# Altium PCB micromouse.PcbDoc (part 2 of 2)
Units mil, origin at the board's own origin, x right, y up, seen from the top; angles counter-clockwise.
Board outline 2757.75 x 3935.86 mil, 2 copper layers (Top, Bottom); 175 components, 116 nets, 552 pads, 234 vias.
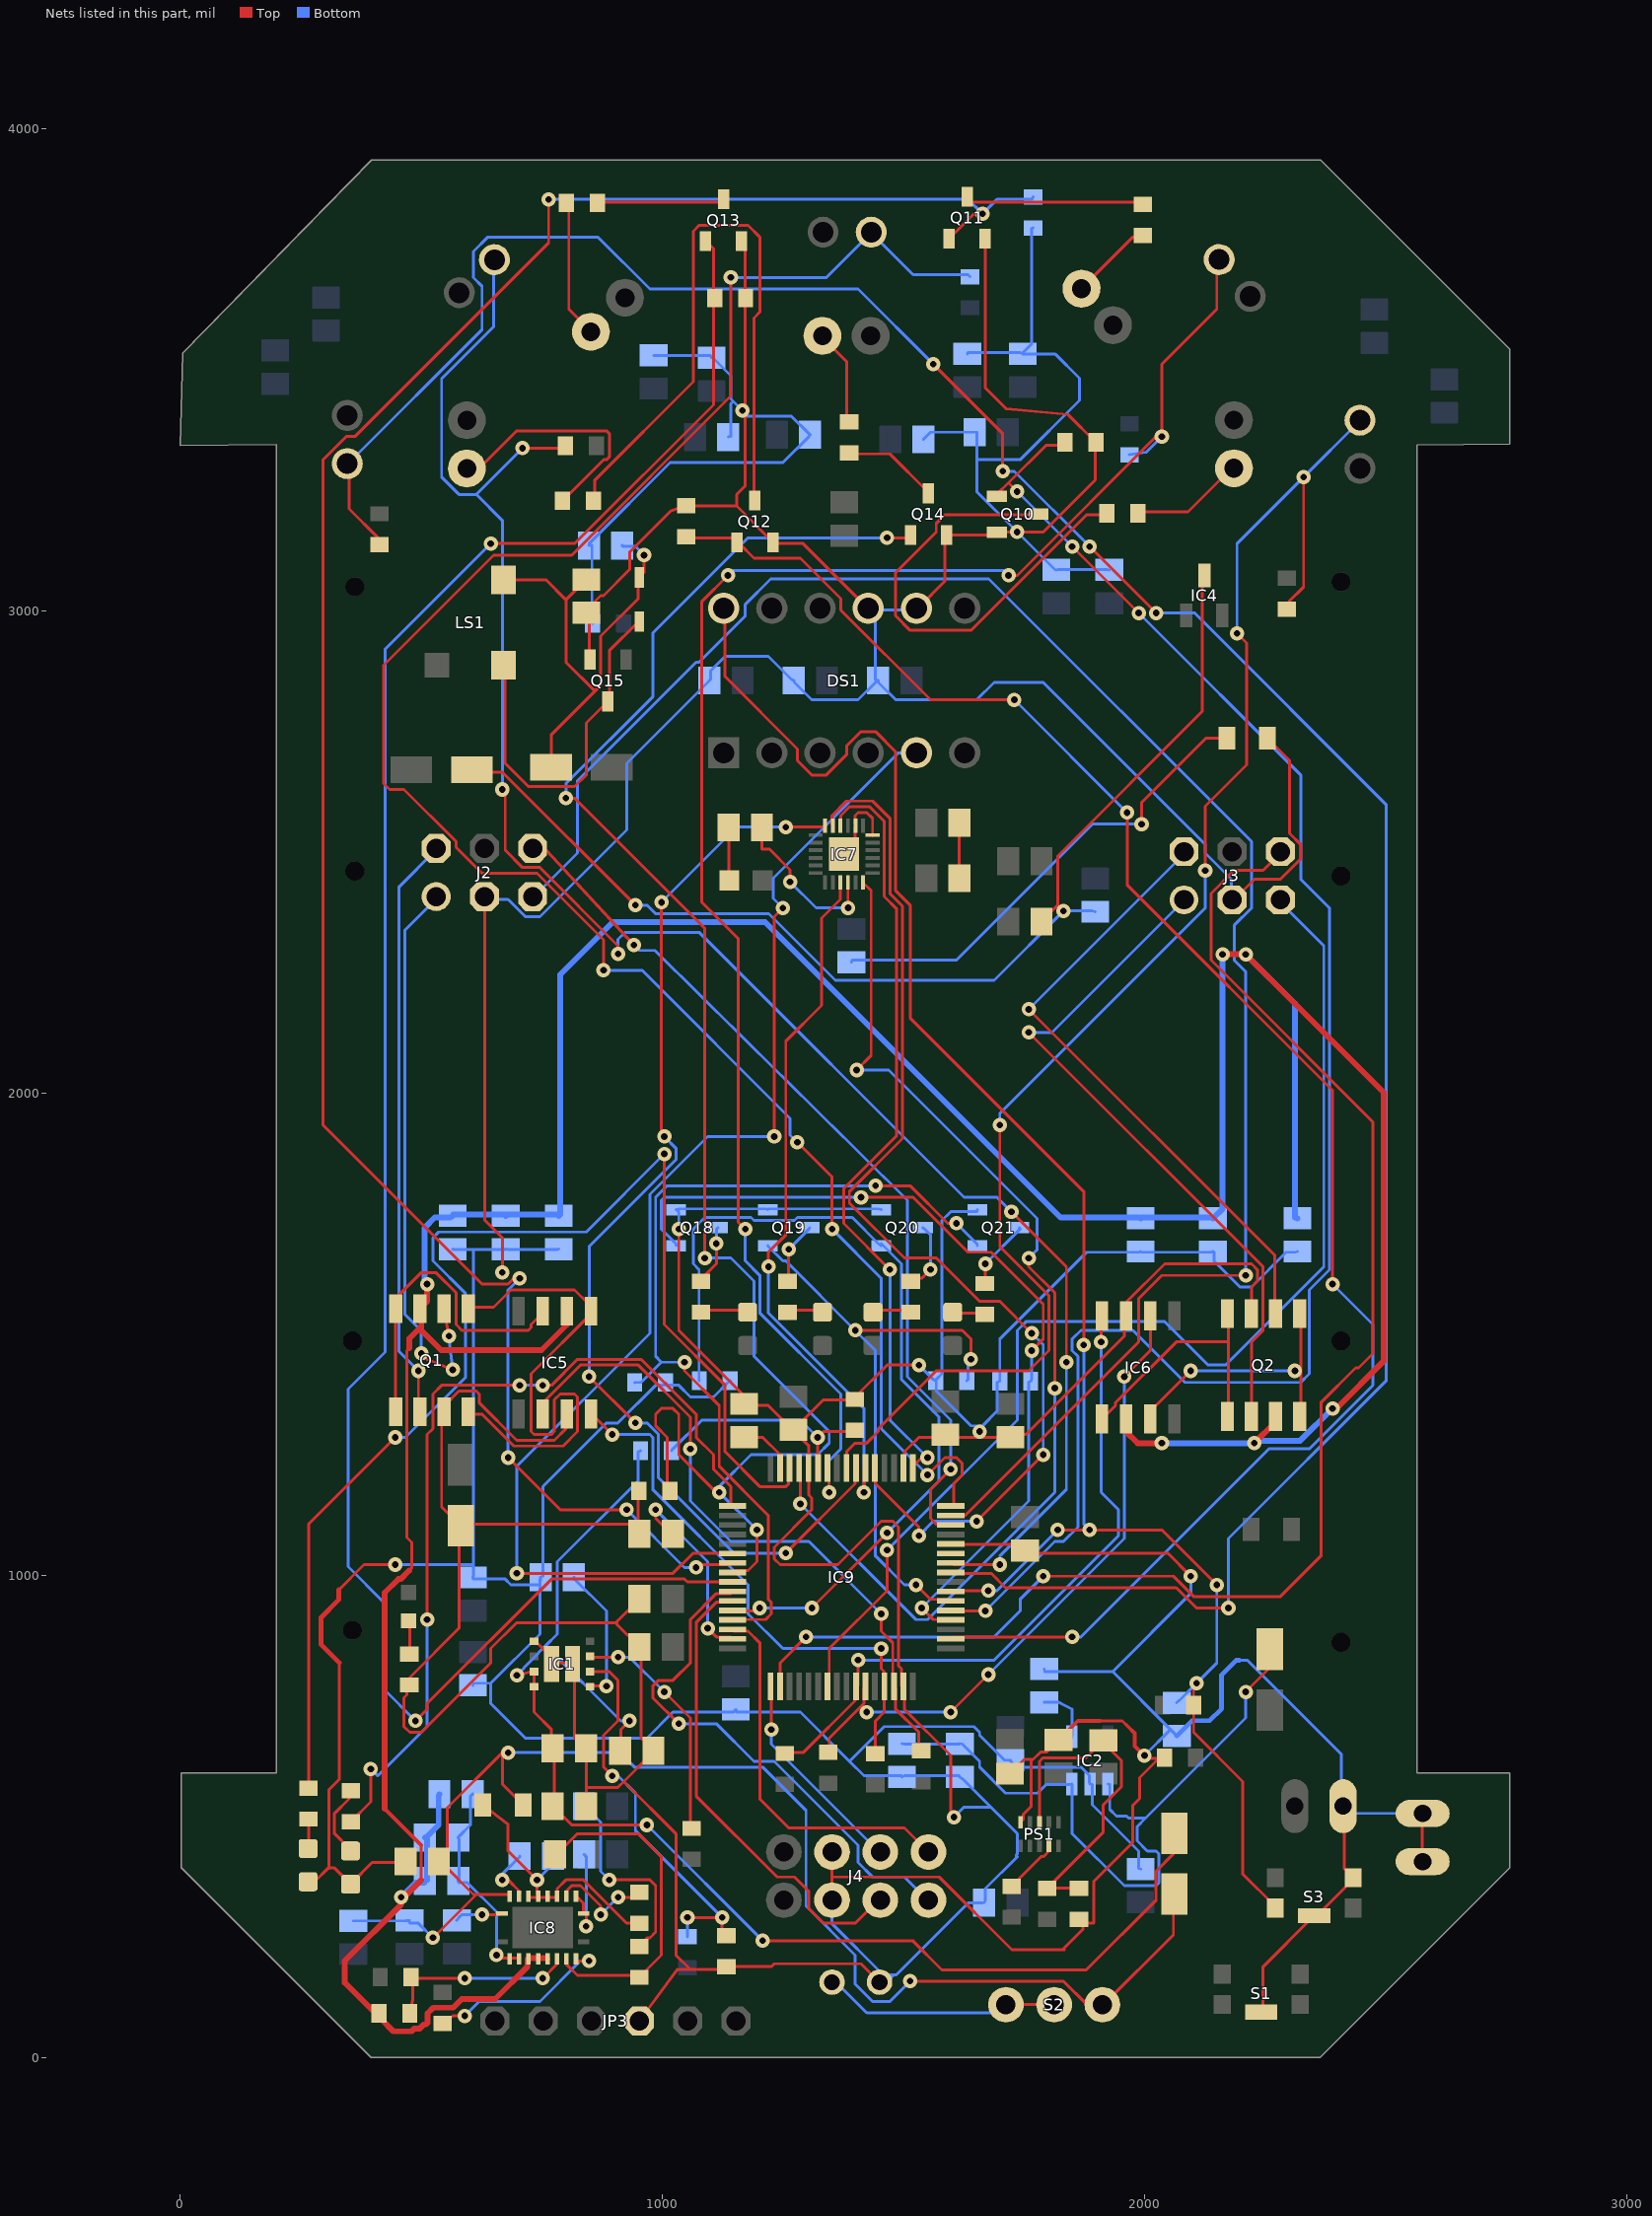
[diagram p2: the nets of this part, all layers, seen from the top]

## Via types
v1: diameter 29.78/29.78 (per signal layer), hole 13.78, Top to Bottom, 234 vias

## Nets (pads, with @x,y where several pads share a name; then routed paths per layer and width w, separated by ;. In a path a pad name is that pad's centre, name@x,y a point inside that pad or via, vN(x,y) a via of type N, cw(c..) or ccw(c..) an arc to the next point about the centre after c; other vN are vias at no path point) (continued)
GND: C2V_1.1 C2V_3.1 C3.3V_7.1 C5V4_5.2 C_3.3V_5.1 C_3.3V_6.1 C_5V4_4.1 C_A3.3V_1.1 C_A3.3V_3.1 C_BAT.2 C_DSP1.2 C_DSP2.2 C_DSP3.2 C_EM1.2 C_EM2.2 C_EM3.2 C_EM4.2 C_EM5.2 C_EM6.2 C_EM7.2 C_EM8.2 C_EM9.2 C_EM10.2 C_EM11.2 C_EM12.1 C_M1.2 C_M2.1 C_M4.1 C_M5.2 C_MB_L.1 C_MB_R.1 C_RST.2 C_SS1.1 C_V1.1 C_V2.2 C_V3.2 C_V4.2 C_VA1.2 C_VA2.2 C_VBAT1.2 C_VBAT2.2 C_VBAT3.1 C_VBAT4.1 C_VCAP1.1 C_VCAP2.2 CNR.1 D22.C D23.C DS1.8 DS1.9 IC1.5 IC1.9 IC1.10 IC2.2 IC5.3 IC6.3 IC9.12 IC9.18 IC9.28 IC9.63 J1.2 J2.3 J3.3 J4.3 J4.4 JP1.1 JP2.1 JP2.2 JP3.3 L1.1 L5.1 PS1.10 Q1.3 Q2.3 Q10.2 Q11.2 Q12.2 Q13.2 Q14.2 Q15.2 Q18.2 Q19.2 Q20.2 Q21.2 R_2V1.2 R_FBB2.1 R_LED1_PULLUP1.1 R_LED1_PULLUP2.1 R_LED1_PULLUP3.1 R_LED1_PULLUP.1 R_LED6.2 R_PWR1.1 R_R9.1 R_R11.1 R_R13.1 R_R15.1 R_R16.1 R_R18.1 R_VM2.1 S1.5 S3.4 S3.5 | length 28962
  Top w6: D23.C@265.85,362.3 D23.C@265,364.36 278.52,364.37 307.85,393.7 ; 307.85,392.3 307.85,393.7 ; 328.43,969.87 380.85,1022.3 v1(445.85,1022.3) ; 329.8,818.5 329.8,576.95 307.85,555 307.85,393.7 ; D22.C@349.85,362.3 D22.C@353.15,359.36 ; C_VBAT2.2@467.39,406.3 463.85,404.3 397.85,404.3 355.85,362.3 D22.C@353.15,359.36 ; J2.3@630.71,2408.03 631.85,2402.3 631.85,1736.3 667.85,1700.3 v1(667.85,1628.3) ; IC1.5@733.78,863.54 733.85,860.3 739.85,860.3 769.85,830.3 769.85,818.3 IC1.9@770.2,816.3 775.85,818.3 811.85,818.3 IC1.10@813.5,816.3 817.85,812.3 817.85,662.3 835.85,644.3 C_VBAT1.2@841.31,641.3 841.85,638.3 841.85,560.3 ; IC5.3@801.85,1334.57 799.85,1334.3 799.85,1304.3 775.85,1280.3 697.85,1280.3 619.85,1358.3 619.85,1376.3 613.85,1382.3 577.85,1382.3 547.85,1352.3 547.85,1340.3 Q1.3@546.85,1339.53 541.85,1334.3 541.85,1142.3 577.85,1106.3 L5.1@581.85,1103.31 ; C_VBAT3.1@841.31,521.3 841.85,524.3 841.85,560.3 ; Q15.2@849.45,2899.61 847.85,2900.3 847.85,2990.3 841.85,2996.3 C_EM12.1@841.85,2996.84 841.85,3002.3 871.85,3032.3 877.85,3032.3 931.85,3086.3 931.85,3122.3 1017.71,3208.15 R_R13.1@1049.37,3219.05 1050.85,3218.3 1153.85,3218.3 ; R_R16.1@951.3,1175.31 949.85,1172.3 C_VCAP2.2@949.85,1106.3 ; C_VA1.2@952.39,951.3 905.85,904.76 905.85,901.3 ; JP3.3@952.48,75.7 1030.73,182.3 1057.85,182.3 ; v1(1033.85,1718.3) 1033.85,1508.3 1165.85,1376.3 1165.85,1358.3 C_VCAP1.1@1169.64,1355.76 1171.85,1352.3 1219.85,1352.3 1267.85,1304.3 C_BAT.2@1271.85,1301.84 ; Q13.2@1164.25,3767.99 1165.85,3764.3 1171.85,3758.3 1171.85,3650.3 R_R15.1@1172.55,3649.48 1171.85,3644.3 v1@1171.85,3416.3 ; v1(1165.85,3416.3) v1@1171.85,3416.3 ; J4.3@1351.85,326.3 1351.85,374.3 ; J4.4@1351.85,426.3 1351.85,374.3 ; DS1.9@1426.85,3006.3 1423.85,3008.3 1291.85,3140.3 1231.85,3140.3 Q12.2@1229.25,3142.99 1225.85,3146.3 1153.85,3218.3 ; J1.2@1450.28,156.3 1447.85,158.3 1411.85,194.3 1231.85,194.3 1225.85,188.3 1135.85,188.3 R_FBB2.1@1132.44,188.21 1129.85,182.3 1057.85,182.3 ; IC9.18@1499.8,1222.68 1501.85,1226.3 1501.85,1256.3 1531.85,1286.3 1585.85,1286.3 C_V3.2@1586.85,1291.84 1591.85,1286.3 v1@1657.85,1286.3 ; DS1.8@1526.85,3006.3 1531.85,3008.3 1585.85,3062.3 1585.85,3152.3 Q14.2@1589.25,3157.99 1591.85,3158.3 1687.85,3158.3 Q10.2@1693.54,3163.9 1693.85,3164.3 v1(1735.85,3164.3) 1789.85,3164.3 1897.85,3272.3 1897.85,3344.3 R_R9.1@1898.98,3350.19 1840.96,3408.22 1713.49,3419.65 1669.85,3463.3 1669.85,3770.3 Q11.2@1669.25,3772.99 ; v1(1531.85,1436.3) 1465.85,1436.3 1399.85,1370.3 R_VM2.1@1398.86,1364.93 1393.85,1364.3 1333.85,1364.3 1273.85,1304.3 C_BAT.2@1271.85,1301.84 ; IC9.12@1598.23,1065.2 1603.85,1064.3 1735.85,1064.3 1747.85,1052.3 C_V2.2@1751.85,1051.84 1753.85,1046.3 2047.85,1046.3 v1(2095.85,998.3) ; v1(1604.8,498.5) 1597.85,505.45 1597.85,626.3 1501.85,722.3 1501.85,764.3 IC9.63@1499.8,769.92 1495.85,770.3 1495.85,806.3 1489.85,812.3 1489.85,1100.3 1477.85,1112.3 1453.85,1112.3 1363.85,1022.3 1243.85,1022.3 1231.85,1034.3 1231.85,1058.3 1309.85,1136.3 1309.85,1160.3 1303.85,1166.3 1303.85,1220.3 IC9.28@1302.95,1222.68 1303.85,1226.3 1303.85,1268.3 1273.85,1298.3 C_BAT.2@1271.85,1301.84 ; v1(1657.85,1298.3) v1@1657.85,1286.3 ; C2V_3.1@1720.71,588.69 1750.52,618.5 1765.16,618.5 ; PS1.10@1742.63,487.76 1748.4,493.52 1748.4,504.28 1765.16,521.04 1765.16,618.5 ; C2V_1.1@1830.74,667.56 1796.49,633.31 1783.95,633.31 1769.13,618.5 1765.16,618.5 ; 1833.85,223.3 1829.8,223.3 ; R_2V1.2@1864.09,286.76 R_2V1.2@1872.35,278.5 ; 1908.25,698.32 1953.78,698.32 1964.8,687.3 ; v1(1999.85,626.3) 1999.85,620.3 R_LED6.2@2029.8,620.3 ; R_LED6.2@2041.36,621.77 2035.85,620.3 R_LED6.2@2029.8,620.3 ; J3.3@2181.85,2401.3 2185.85,2402.3 2227.85,2444.3 2281.85,2444.3 2323.85,2486.3 2323.85,2516.3 2300.85,2539.3 2300.85,2690.39 L1.1@2254.59,2736.65 ; Q2.3@2221.85,1543.07 2221.85,1598.3 2233.85,1610.3 2233.85,1634.3 2221.85,1646.3 2041.85,1646.3 1963.85,1568.3 1963.85,1538.3 IC6.3@1961.85,1538.03 1957.85,1532.3 1957.85,1496.3 1753.85,1292.3 1723.85,1292.3 C_V4.2@1721.85,1286.84 1717.85,1286.3 v1@1657.85,1286.3 ; S1.5@2241.85,94.05 2245.85,98.3 2245.85,188.3 2347.85,290.3 2351.85,294.05 2353.85,290.3 2431.85,368.3 S3.4@2432.56,372.8 2431.85,374.3 2413.85,392.3 2413.85,518.3 JP1.1@2411.85,521.3 ; JP2.1@2576.85,406.3 2575.85,410.3 2575.85,506.3 JP2.2@2576.85,506.3 ; 307.85,393.7 318.82,393.7 D22.C@353.15,359.36 ; L5.1@581.85,1103.31 583.85,1106.3 C_VCAP2.2@949.85,1106.3 ; L5.1@581.85,1103.31 577.85,1100.3 577.85,890.3 475.85,788.3 475.85,776.3 474.92,772.85 469.85,770.3 469.85,752.3 463.85,746.3 463.85,686.3 475.85,674.3 499.85,674.3 643.85,818.3 643.85,848.3 696.85,901.3 905.85,901.3 ; 841.85,560.3 907.85,560.3 919.85,572.3 ; 905.85,901.3 905.85,897.83 C_VA2.2@952.39,851.3 955.85,848.3 955.85,662.3 979.85,638.3 C_VBAT4.1@981.31,636.3 979.85,632.3 919.85,572.3 ; 919.85,572.3 1027.85,464.3 1027.85,212.3 1057.85,182.3 ; C_VCAP2.2@949.85,1106.3 C_VCAP2.2@952.39,1086.3 949.85,1088.3 C_VCAP2.2@949.85,1106.3 ; 1153.85,3218.3 1153.85,3242.3 1171.85,3260.3 v1@1171.85,3416.3 ; 1351.85,374.3 1573.85,374.3 1724.85,223.3 1829.8,223.3 ; 1829.8,223.3 1872.35,265.85 R_2V1.2@1872.35,278.5 ; R_2V1.2@1872.35,278.5 1894.8,278.5 1894.8,365.25 1975.85,446.3 1975.85,523.27 1989.8,537.22 1989.8,580.3 R_LED6.2@2029.8,620.3
  Top w8: C2V_1.1@1821.49,658.31 1830.74,667.56 1861.49,698.32 1908.25,698.32 ; 1964.8,687.3 1979.8,672.3 1979.8,646.34 v1(1999.85,626.3)
  Top w10: 328.43,969.87 328.43,949.27 292.08,912.93 292.08,856.22 329.8,818.5
  Bottom w6: v1(445.85,1022.3) 607.85,1022.3 ; C_MB_L.1@565,1676.84 565.85,1676.3 607.85,1676.3 ; C_5V4_4.1@606.85,771.84 607.85,776.3 643.85,776.3 ; J2.3@630.71,2408.03 631.85,2402.3 679.85,2402.3 715.85,2366.3 745.85,2366.3 925.85,2546.3 925.85,2684.3 1093.85,2852.3 C_DSP3.2@1097.39,2856.3 1099.85,2858.3 1099.85,2876.3 1129.85,2906.3 1219.85,2906.3 1267.85,2858.3 C_DSP1.2@1272.39,2856.3 1273.85,2852.3 1309.85,2816.3 1405.85,2816.3 1441.85,2852.3 C_DSP2.2@1447.39,2856.3 ; v1(667.85,1628.3) C_M2.1@667.85,1676.3 ; C_M1.2@785,1676.84 781.85,1676.3 679.85,1676.3 C_M2.1@675,1676.84 ; R_R18.1@855,2974.52 853.85,2978.3 853.85,3136.3 C_EM11.2@847.39,3136.3 847.85,3140.3 1015.85,3308.3 1249.85,3308.3 1303.85,3362.3 C_EM5.2@1306.31,3366.3 1303.85,3368.3 1267.85,3404.3 1165.85,3404.3 v1(1165.85,3416.3) 1146.72,3435.42 ; C_EM7.2@981.85,3530.76 985.85,3530.3 1099.85,3530.3 C_EM8.2@1101.85,3525.76 1105.85,3524.3 1141.85,3488.3 1141.85,3440.3 1146.72,3435.42 ; v1(1033.85,1718.3) 1033.85,1754.3 Q18.2@1028.54,1758.7 1033.85,1760.3 1213.85,1760.3 Q19.2@1218.54,1758.7 1219.85,1760.3 1447.85,1760.3 Q20.2@1453.54,1758.7 ; C_EM6.2@1136.31,3361.3 1141.85,3362.3 1141.85,3430.55 1146.72,3435.42 ; R_LED1_PULLUP2.1@1140.55,1403.93 1135.85,1400.3 1105.85,1370.3 1057.85,1370.3 1033.85,1394.3 1009.85,1394.3 R_LED1_PULLUP3.1@1006.65,1400.07 1003.85,1394.3 985.85,1394.3 907.85,1316.3 883.85,1316.3 751.85,1184.3 751.85,998.3 C_SS1.1@747.39,996.3 ; J4.3@1351.85,326.3 1351.85,277.3 1457.85,171.3 1479.8,171.3 ; J1.2@1447.85,158.3 J1.2@1450.28,156.3 1464.8,156.3 1479.8,171.3 ; DS1.8@1526.85,3006.3 1525.85,3002.3 1453.85,3002.3 DS1.9@1441.85,2990.3 ; v1(1531.85,1436.3) 1561.85,1406.3 R_LED1_PULLUP1.1@1567.05,1403.66 ; C_EM10.2@1541.31,3356.3 1556.31,3371.3 C_EM9.2@1647.39,3371.3 1651.85,3371.3 1651.85,3314.3 ; v1(1604.8,498.5) 1625.72,519.42 1680.72,519.42 ; C_EM3.2@1632.4,3533.9 1633.85,3536.3 1741.85,3536.3 C_EM4.2@1747.4,3533.9 ; Q21.2@1653.54,1758.7 1651.85,1754.3 1597.85,1754.3 1579.85,1736.3 1579.85,1418.3 1567.85,1406.3 R_LED1_PULLUP1.1@1567.05,1403.66 ; 1657.85,668.3 1657.85,668.5 ; v1(1657.85,1298.3) v1@1657.85,1310.3 ; 1735.85,416.3 1733.93,414.37 ; R_R11.1@1768.97,3795.2 1765.85,3794.3 1765.85,3554.3 1747.85,3536.3 C_EM4.2@1747.4,3533.9 ; CNR.1@1791.85,805.76 1792.85,800.3 1933.85,800.3 ; C_EM2.2@1926.85,3085.76 1921.85,3086.3 1819.85,3086.3 C_EM1.2@1816.85,3085.76 1813.85,3086.3 v1(1735.85,3164.3) 1651.85,3248.3 1651.85,3314.3 ; C_3.3V_6.1@1991.85,390.76 1987.85,392.3 1987.85,428.3 1891.85,524.3 1891.85,566.3 IC2.2@1886.57,566.97 1885.85,572.3 1885.85,584.3 1867.85,602.3 1727.75,602.3 C_A3.3V_3.1@1721.85,616.84 1709.52,616.83 1657.85,668.5 ; v1(1999.85,626.3) C_RST.2@2053.85,680.3 ; v1(2095.85,998.3) 2095.85,962.3 1933.85,800.3 ; J3.3@2181.85,2401.3 2179.85,2402.3 2179.85,2444.3 2125.85,2498.3 2125.85,2516.3 1789.85,2852.3 1687.85,2852.3 1651.85,2816.3 1483.85,2816.3 1447.85,2852.3 C_DSP2.2@1447.39,2856.3 ; 2196.85,824.3 2212.85,824.3 2407.85,629.3 2407.85,524.3 JP1.1@2411.85,521.3 2413.85,518.3 2425.85,506.3 JP2.2@2576.85,506.3 ; C_MB_R.1@2316.85,1671.84 2311.85,1670.3 2293.85,1670.3 2221.85,1598.3 2197.85,1598.3 2143.85,1652.3 2143.85,1670.3 C_M4.1@2141.85,1671.84 2137.85,1670.3 1993.85,1670.3 C_M5.2@1991.85,1671.84 1987.85,1670.3 1879.85,1670.3 1699.85,1490.3 1699.85,1406.3 R_LED1_PULLUP.1@1699.65,1402.95 1693.85,1400.3 1693.85,1340.3 1663.85,1310.3 v1@1657.85,1310.3 ; 607.85,1022.3 607.85,1676.3 ; 607.85,1022.3 607.85,998.3 C5V4_5.2@606.85,995.76 607.85,992.3 673.85,992.3 685.85,980.3 C_SS1.1@745.85,980.3 ; 607.85,1676.3 C_M2.1@667.85,1676.3 ; 643.85,776.3 643.85,734.3 715.85,662.3 967.85,662.3 1021.85,716.3 1147.85,716.3 C_V1.1@1151.85,721.84 1153.85,716.3 1285.85,716.3 1387.85,614.3 ; 643.85,776.3 745.85,878.3 C_SS1.1@745.85,980.3 ; C_M2.1@667.85,1676.3 C_M2.1@675,1676.84 ; C_M2.1@667.85,1676.3 673.85,1676.3 C_M2.1@675,1676.84 ; C_SS1.1@745.85,980.3 C_SS1.1@747.39,996.3 ; C_SS1.1@745.85,980.3 745.85,992.3 C_SS1.1@747.39,996.3 ; 1387.85,614.3 1459.85,686.3 1645.85,686.3 1657.85,674.3 1657.85,668.5 ; 1387.85,614.3 1417.85,584.3 1495.85,584.3 C_3.3V_5.1@1496.85,581.84 1501.85,584.3 1615.85,584.3 C_A3.3V_1.1@1616.85,581.84 1621.85,578.3 1680.72,519.42 ; DS1.9@1441.85,2990.3 DS1.9@1426.85,3006.3 1429.85,3002.3 DS1.9@1441.85,2990.3 ; DS1.9@1441.85,2990.3 1441.85,2858.3 C_DSP2.2@1447.39,2856.3 ; 1479.8,171.3 1484.85,171.3 1633.85,320.3 1663.85,320.3 C3.3V_7.1@1667.39,321.3 1669.85,326.3 1669.85,350.3 1733.93,414.37 ; R_LED1_PULLUP1.1@1567.05,1403.66 1567.85,1400.3 1567.85,1382.3 1639.85,1310.3 v1@1657.85,1310.3 ; 1651.85,3314.3 1741.85,3314.3 1864.85,3437.3 1864.85,3483.3 1814.23,3533.91 C_EM4.2@1747.4,3533.9 ; 1680.72,519.42 1735.85,464.3 1735.85,422.3 1733.93,420.37 1733.93,414.37 ; 1933.85,800.3 C_RST.2@2053.85,680.3 ; C_RST.2@2053.85,680.3 C_RST.2@2066.85,666.84 2065.85,668.3 C_RST.2@2053.85,680.3
  Bottom w10: C_RST.2@2066.85,666.84 2098.52,698.5 2134.8,698.5 2159.8,723.5 2159.8,793.5 2190.6,824.3 2196.85,824.3
INT: IC7.12 IC9.29 | length 2319.6
  Top w6: IC9.29@1283.27,1222.68 1285.85,1220.3 v1(1285.85,1148.3) ; v1(1402.85,2048.3) 1432.85,2078.3 1432.85,2420.61 IC7.12@1416.22,2437.24 ; v1(1759.85,1658.3) 1759.85,1640.3 1813.85,1586.3 v1(1813.85,1388.3)
  Bottom w6: v1(1285.85,1148.3) 1525.85,908.3 1549.85,908.3 1813.85,1172.3 v1(1813.85,1388.3) ; v1(1402.85,2048.3) 1469,2048.3 1776.85,1740.44 1776.85,1675.3 v1(1759.85,1658.3)
JTCK: IC9.49 J4.6 | length 438.3
  Top w6: IC9.49@1224.21,769.92 1225.85,764.3 v1(1225.85,680.3)
  Bottom w6: v1(1225.85,680.3) 1225.85,650.3 1447.85,428.3 J4.6@1451.85,426.3
JTMS: IC9.46 J4.8 | length 787.9
  Top w6: IC9.46@1145.47,888.03 1147.85,884.3 1177.85,884.3 1201.85,860.3 1201.85,536.3 1261.85,476.3 1501.85,476.3 J4.8@1551.85,426.3
L_EMITTER: IC9.2 Q12.1 R_R13.2 | length 3659.4
  Top w6: R_R13.2@1049.37,3154.87 1050.85,3152.3 1147.85,3152.3 1153.85,3146.3 Q12.1@1154.45,3142.99 1159.85,3140.3 1189.85,3110.3 1285.85,3110.3 1369.85,3026.3 1369.85,3002.3 1555.85,2816.3 v1(1729.85,2816.3) ; IC9.2@1598.23,868.34 1603.85,872.3 v1(1849.85,872.3) ; v1(1963.85,2582.3) 1963.85,2432.3 2389.85,2006.3 v1(2389.85,1604.3)
  Bottom w6: v1(1729.85,2816.3) v1(1963.85,2582.3) ; v1(1849.85,872.3) 1867.85,872.3 2257.85,1262.3 2341.85,1262.3 2473.85,1394.3 2473.85,1520.3 v1(2389.85,1604.3)
L_RECEIVER_1: IC9.9 Q8.1 R_R6.2 | length 5606.9
  Top w6: Q8.1@346.3,3306.14 349.85,3302.3 349.85,3212.3 409.85,3152.3 409.85,3140.3 R_R6.2@413.03,3137.8 ; v1(1561.85,3512.3) 1705.85,3368.3 v1(1705.85,3290.3) ; IC9.9@1598.23,1006.14 1603.85,1004.3 1681.85,1004.3 1711.85,974.3 2065.85,974.3 2107.85,932.3 v1(2173.85,932.3) ; v1(1885.85,3134.3) v1(2023.85,2996.3)
  Bottom w6: Q8.1@346.3,3306.14 349.85,3308.3 625.85,3584.3 625.85,3674.3 607.85,3692.3 607.85,3746.3 637.85,3776.3 865.85,3776.3 973.85,3668.3 1405.85,3668.3 v1(1561.85,3512.3) ; v1(1705.85,3290.3) 1729.85,3290.3 v1(1885.85,3134.3) ; v1(2023.85,2996.3) 2103.85,2996.3 2500.85,2599.3 2500.85,1403.3 2173.85,1076.3 v1(2173.85,932.3)
LED1: IC9.4 Q18.1 R_LED1_PULLUP.2 | length 1798.6
  Top w6: v1(1411.85,1784.3) 1519.85,1784.3 1633.85,1670.3 1681.85,1670.3 1789.85,1562.3 1789.85,1490.3 v1(1765.85,1466.3) ; v1(1537.85,932.3) 1561.85,908.3 1597.85,908.3 IC9.4@1598.23,907.72
  Bottom w6: Q18.1@1028.54,1683.9 1027.85,1688.3 997.85,1718.3 997.85,1778.3 1003.85,1784.3 v1(1411.85,1784.3) ; v1(1537.85,932.3) 1759.85,1154.3 1759.85,1400.3 R_LED1_PULLUP.2@1763.83,1402.95 1765.85,1406.3 v1(1765.85,1466.3)
LED2: IC9.6 Q19.1 R_LED1_PULLUP1.2 | length 1273.7
  Top w6: v1(1399.85,1508.3) 1621.85,1508.3 1639.85,1490.3 v1(1639.85,1448.3) ; v1(1525.85,980.3) 1555.85,950.3 1597.85,950.3 IC9.6@1598.23,947.09
  Bottom w6: Q19.1@1218.54,1683.9 1219.85,1682.3 1249.85,1652.3 1255.85,1652.3 v1(1399.85,1508.3) 1441.85,1466.3 1441.85,1040.3 1501.85,980.3 v1(1525.85,980.3) ; R_LED1_PULLUP1.2@1631.23,1403.66 1633.85,1406.3 1633.85,1442.3 v1(1639.85,1448.3)
LED3: IC9.44 Q20.1 R_LED1_PULLUP2.2 | length 1834.5
  Top w6: IC9.44@1145.47,927.4 1147.85,926.3 1195.85,926.3 v1(1201.85,932.3) ; v1(1309.85,932.3) v1(1465.85,1088.3)
  Bottom w6: R_LED1_PULLUP2.2@1076.36,1403.93 1075.85,1406.3 1075.85,1634.3 1063.85,1646.3 1063.85,1718.3 1087.85,1742.3 1183.85,1742.3 1189.85,1736.3 1273.85,1736.3 1279.85,1742.3 1393.85,1742.3 1447.85,1688.3 Q20.1@1453.54,1683.9 1453.85,1688.3 1495.85,1646.3 1495.85,1406.3 1573.85,1328.3 1573.85,1196.3 v1(1465.85,1088.3) ; v1(1201.85,932.3) v1(1309.85,932.3)
LED4: IC9.45 Q21.1 R_LED1_PULLUP3.2 | length 1880.1
  Top w6: v1(1045.85,1442.3) 1045.85,1424.3 1117.85,1352.3 1117.85,1226.3 1219.85,1124.3 1219.85,950.3 1225.85,944.3 1225.85,920.3 1213.85,908.3 1147.85,908.3 IC9.45@1145.47,907.72 ; v1(1441.85,1808.3) 1513.85,1808.3 1591.85,1730.3 v1(1609.85,1730.3)
  Bottom w6: R_LED1_PULLUP3.2@942.47,1400.07 943.85,1400.3 955.85,1400.3 997.85,1442.3 ; v1(1045.85,1442.3) 997.85,1442.3 ; v1(1441.85,1808.3) 1009.85,1808.3 985.85,1784.3 985.85,1454.3 997.85,1442.3 ; v1(1609.85,1730.3) 1651.85,1688.3 Q21.1@1653.54,1683.9
LED7: IC9.30 R_LED8.1 | length 2736.6
  Top w6: R_LED8.1@265.82,558.69 265.85,560.3 265.85,1106.3 v1(445.85,1286.3) ; v1(1003.85,1874.3) 1003.85,1520.3 1129.85,1394.3 1129.85,1256.3 1201.85,1184.3 1255.85,1184.3 1261.85,1190.3 1261.85,1220.3 IC9.30@1263.58,1222.68
  Bottom w6: v1(445.85,1286.3) 466.85,1286.3 591.85,1411.3 591.85,1584.3 523.85,1652.3 523.85,1700.3 535.85,1712.3 841.85,1712.3 v1(1003.85,1874.3)
LED8: IC9.33 R_LED9.2 | length 1831.1
  Top w6: R_LED9.2@353.62,488.96 395,530.34 v1(395,598.55) ; v1(511.85,908.3) 511.85,1292.3 523.85,1304.3 523.85,1376.3 541.85,1394.3 v1(703.85,1394.3) ; v1(751.85,1394.3) 769.85,1394.3 823.85,1448.3 955.85,1448.3 1069.85,1334.3 1069.85,1286.3 1105.85,1250.3 1105.85,1220.3 1141.85,1184.3 1141.85,1148.3 IC9.33@1145.47,1143.94
  Bottom w6: v1(395,598.55) 409.85,584.3 511.85,686.3 v1(511.85,908.3) ; v1(703.85,1394.3) v1(751.85,1394.3)
LENCHA: IC9.14 J2.6 | length 1845.5
  Top w6: J2.6@730.71,2508.03 733.85,2504.3 758.85,2504.3 v1(940.75,2307.7) ; v1(1597.85,1220.3) 1555.85,1178.3 1555.85,1118.3 1567.85,1106.3 1597.85,1106.3 IC9.14@1598.23,1104.57
  Bottom w6: v1(940.75,2307.7) 951.19,2297.27 984.09,2296.37 1507.85,1778.3 1507.85,1412.3 1597.85,1322.3 v1(1597.85,1220.3)
LENCHB: IC9.15 J2.5 | length 3887.3
  Top w6: IC9.15@1598.23,1124.25 1603.85,1124.3 1627.85,1124.3 1987.85,1484.3 1987.85,1574.3 2035.85,1622.3 v1(2209.85,1622.3)
  Bottom w6: J2.5@730.71,2408.03 733.85,2408.3 823.85,2498.3 823.85,2648.3 1069.85,2894.3 1075.85,2894.3 1171.85,2990.3 1171.85,3014.3 1224.85,3067.3 1676.85,3067.3 2221.85,2522.3 2221.85,2384.3 2185.85,2348.3 2185.85,2276.3 2209.85,2252.3 v1(2209.85,1622.3)
LF_EMITTER: IC9.5 Q10.1 R_R9.2 | length 3614.1
  Top w6: IC9.5@1598.23,927.4 1603.85,926.3 v1(1669.85,926.3) ; Q10.1@1693.54,3238.7 1693.85,3242.3 1717.85,3266.3 ; v1(1735.85,3248.3) 1717.85,3266.3 ; R_R9.2@1834.8,3350.19 1831.85,3344.3 1795.85,3344.3 1717.85,3266.3 ; v1(1849.85,3134.3) v1(1987.85,2996.3)
  Bottom w6: v1(1669.85,926.3) 1813.85,1070.3 1831.85,1070.3 1861.85,1100.3 1861.85,1454.3 1849.85,1466.3 1849.85,1490.3 1867.85,1508.3 1975.85,1508.3 2083.85,1400.3 2323.85,1400.3 2341.85,1418.3 2341.85,1592.3 2383.85,1634.3 2383.85,2384.3 2323.85,2444.3 2323.85,2660.3 v1(1987.85,2996.3) ; v1(1735.85,3248.3) v1(1849.85,3134.3)
LF_RECEIVER: IC9.10 Q9.1 R_R7.2 | length 3938.8
  Top w6: v1(667.85,2630.3) 673.85,2624.3 673.85,2504.3 709.85,2468.3 745.85,2468.3 907.85,2306.3 v1(907.85,2289.3) ; v1(709.85,3338.3) 793.85,3338.3 R_R7.2@798.9,3343.22 ; IC9.10@1598.23,1025.83 1603.85,1022.3 v1(1699.85,1022.3) ; v1(1723.85,1754.3) 1837.85,1640.3 v1(1837.85,1442.3)
  Bottom w6: Q9.1@651.45,3729.23 649.85,3728.3 649.85,3590.3 541.85,3482.3 541.85,3278.3 577.85,3242.3 613.85,3242.3 ; v1(667.85,2630.3) 667.85,3188.3 613.85,3242.3 ; v1(709.85,3338.3) 613.85,3242.3 ; v1(907.85,2289.3) 907.85,2319.3 921.85,2333.3 1076.85,2333.3 1625.85,1784.3 1693.85,1784.3 v1(1723.85,1754.3) ; v1(1699.85,1022.3) 1699.85,1040.3 1837.85,1178.3 v1(1837.85,1442.3)
  Bottom w10: Q9.1@649.85,3728.3 650.52,3728.3 Q9.1@651.45,3729.23
LPWMA: IC5.2 IC9.62 R_PWMUP_1.1 | length 1394
  Top w6: IC5.2@751.85,1334.57 751.85,1358.3 829.85,1436.3 949.85,1436.3 1057.85,1328.3 v1(1057.85,1262.3) ; v1(1453.85,920.3) 1453.85,884.3 1477.85,860.3 1477.85,770.3 IC9.62@1480.12,769.92 1483.85,764.3 1483.85,722.3 1531.85,674.3 1531.85,638.3 R_PWMUP_1.1@1536.85,636.29
  Bottom w6: v1(1057.85,1262.3) 1057.85,1154.3 1141.85,1070.3 1303.85,1070.3 v1(1453.85,920.3)
LPWMB: IC5.4 IC9.61 R_PWMUP_2.1 | length 1130.1
  Top w6: IC5.4@851.85,1334.57 853.85,1334.3 v1(895.85,1292.3) ; R_PWMUP_2.1@1441.57,630.19 1441.85,632.3 1441.85,698.3 1459.85,716.3 1459.85,764.3 IC9.61@1460.43,769.92 1459.85,770.3 1459.85,800.3 1453.85,806.3 v1(1453.85,848.3)
  Bottom w6: v1(895.85,1292.3) 973.85,1292.3 979.85,1286.3 979.85,1178.3 1177.85,980.3 1177.85,920.3 1249.85,848.3 v1(1453.85,848.3)
M_EMITTER: IC9.40 Q14.1 R_R16.2 | length 3589
  Top w6: v1(799.85,2612.3) 817.85,2612.3 1087.85,2342.3 v1(1087.85,1658.3) ; R_R16.2@1015.48,1175.31 1009.85,1178.3 1009.85,1286.3 985.85,1310.3 985.85,1334.3 997.85,1346.3 1021.85,1346.3 1033.85,1334.3 1033.85,1250.3 1111.85,1172.3 v1(1117.85,1172.3) ; IC9.40@1145.47,1006.14 1147.85,1010.3 1177.85,1010.3 1195.85,1028.3 v1(1195.85,1094.3) ; v1(1465.85,3152.3) 1513.85,3152.3 Q14.1@1514.45,3157.99
  Bottom w6: v1(799.85,2612.3) 799.85,2642.3 979.85,2822.3 979.85,2954.3 1177.85,3152.3 v1(1465.85,3152.3) ; v1(1087.85,1658.3) 1141.85,1658.3 1189.85,1610.3 1189.85,1454.3 1345.85,1298.3 1345.85,1274.3 1321.85,1250.3 1183.85,1250.3 1117.85,1184.3 v1(1117.85,1172.3) v1(1195.85,1094.3)
MID_RECEIVER: IC9.16 Q3.1 R_R1.2 | length 4240.1
  Top w6: v1(877.85,2255.3) 877.85,2318.3 739.85,2456.3 625.85,2456.3 571.85,2510.3 571.85,2522.3 463.85,2630.3 433.85,2630.3 421.85,2642.3 421.85,2888.3 649.85,3116.3 811.85,3116.3 1141.85,3446.3 v1(1141.85,3692.3) ; v1(1279.85,1898.3) 1351.85,1826.3 v1(1351.85,1718.3) ; v1(1549.85,1208.3) 1585.85,1244.3 1609.85,1244.3 1621.85,1232.3 1621.85,1208.3 1603.85,1190.3 1603.85,1148.3 IC9.16@1598.23,1143.94
  Bottom w6: v1(877.85,2255.3) 957.85,2255.3 1264.85,1948.3 1264.85,1913.3 v1(1279.85,1898.3) ; v1(1141.85,3692.3) 1339.85,3692.3 1429.85,3782.3 Q3.1@1433.11,3786.26 1435.85,3782.3 1519.85,3698.3 1633.85,3698.3 R_R1.2@1637.87,3693.85 ; v1(1351.85,1718.3) 1453.85,1616.3 1453.85,1304.3 v1(1549.85,1208.3)
N$1: C_SS1.2 IC1.1 | length 287.7
  Top w6: IC1.1@849.92,769.05 853.85,770.3 v1(883.85,770.3)
  Bottom w6: C_SS1.2@816.31,996.3 817.85,992.3 883.85,926.3 v1(883.85,770.3)
N$2: IC5.7 Q1.1 Q1.8 | length 674.6
  Top w6: Q1.1@446.85,1339.53 445.85,1340.3 445.85,1550.3 Q1.8@446.85,1553.07 451.85,1556.3 451.85,1580.3 499.85,1628.3 529.85,1628.3 571.85,1586.3 571.85,1520.3 583.85,1508.3 721.85,1508.3 727.85,1514.3 727.85,1520.3 751.85,1544.3 IC5.7@751.85,1548.03
N$3: IC1.3 R_PG1.2 | length 491.2
  Top w6: IC1.3@849.92,832.05 853.85,830.3 v1(907.85,830.3) ; v1(1003.85,758.3) 1057.85,704.3 1057.85,476.3 R_PG1.2@1060.27,474.99
  Bottom w6: v1(907.85,830.3) 931.85,830.3 v1(1003.85,758.3)
N$4: C_3.3V_5.2 C_A3.3V_1.2 IC2.1 IC2.3 L2.2 | length 1504.2
  Top w6: v1(2209.85,758.3) 2257.85,806.3 2257.85,842.3 L2.2@2260.08,846.65
  Bottom w6: C_3.3V_5.2@1496.85,650.76 1501.85,650.3 1615.85,650.3 C_A3.3V_1.2@1616.85,650.76 1621.85,650.3 1657.85,614.3 1657.85,602.3 1711.85,548.3 1777.85,548.3 1795.85,566.3 1843.85,566.3 IC2.3@1849.17,566.97 1849.85,566.3 1849.85,464.3 1957.85,356.3 2023.85,356.3 2029.85,362.3 2029.85,422.3 2023.85,428.3 2005.85,428.3 1984.43,449.72 1984.43,478.87 2001.93,496.37 ; IC2.1@1923.97,566.97 1927.85,566.3 1927.96,566.18 1927.96,514.4 1941.95,500.41 1962.89,500.41 1966.93,496.37 2001.93,496.37 ; v1(2209.85,758.3) 2209.85,704.3 2001.93,496.37
N$6: PWR_LED1.C R_PWR1.2 | length 69.7
  Top w6: PWR_LED1.C@473.15,905.66 475.85,902.3 475.85,842.3 R_PWR1.2@474.92,837.04
N$7: IC1.2 R_FBB2.2 R_FBT1.1 | length 832.3
  Top w6: IC1.2@849.92,800.55 853.85,800.3 889.85,800.3 907.85,782.3 907.85,698.3 877.85,668.3 877.85,602.3 v1(895.85,584.3) ; v1(1051.85,290.3) v1(1123.85,290.3) 1123.85,260.3 1129.85,254.3 R_FBB2.2@1132.44,252.39
  Bottom w6: v1(895.85,584.3) 907.85,584.3 943.85,548.3 943.85,470.3 v1(1123.85,290.3) ; R_FBT1.1@1051.85,250.48 v1(1051.85,290.3)
N$9: J1.1 S2.1 S2.2 | length 499.1
  Top w6: S2.1@1712.48,109.44 1717.85,110.3 1807.85,110.3 S2.2@1812.48,109.44
  Bottom w6: J1.1@1351.85,156.3 1351.85,152.3 1363.85,152.3 1423.85,92.3 1699.85,92.3 1711.85,104.3 S2.1@1712.48,109.44
N$10: CNR.2 IC2.4 | length 118.5
  Bottom w6: CNR.2@1791.85,736.84 1821.18,736.83 1849.85,722.3 1849.85,668.3 IC2.4@1849.17,665.39
N$11: IC6.7 Q2.1 Q2.8 | length 576.9
  Top w6: IC6.7@2011.85,1324.57 2011.85,1340.3 v1(2095.85,1424.3) ; v1(2311.85,1424.3) v1@2323.85,1424.3 ; Q2.8@2321.85,1329.53 2323.85,1334.3 v1@2323.85,1424.3 ; Q2.1@2321.85,1543.07 2323.85,1538.3 v1@2323.85,1424.3
  Bottom w6: v1(2095.85,1424.3) v1(2311.85,1424.3)
N$12: C5V_1.2 C5V_4.2 IC4.3 L4.2 | length 2411.4
  Top w6: L4.2@604.84,2671.3 607.85,2666.3 667.85,2666.3 v1(943.85,2390.3) ; C5V_1.2@1786.31,2356.3 1789.85,2360.3 1819.85,2390.3 ; v1(1831.85,2378.3) 1819.85,2390.3 ; IC4.3@2123.93,3074.41 2119.85,3074.3 2119.85,2792.3 1819.85,2492.3 1819.85,2390.3
  Bottom w6: v1(943.85,2390.3) 967.85,2390.3 985.85,2372.3 1220.85,2372.3 1358.85,2234.3 1687.85,2234.3 v1(1831.85,2378.3) 1891.85,2378.3 C5V_4.2@1897.52,2376.68
N$13: C_A3.3V.1 L1.2 | length 998.6
  Top w6: v1(1993.85,2558.3) 1993.85,2603.3 2127.2,2736.65 L1.2@2170.55,2736.65
  Bottom w6: C_A3.3V.1@1391.85,2271.84 1393.85,2276.3 1609.85,2276.3 1891.85,2558.3 v1(1993.85,2558.3)
N$14: IC6.5 Q2.4 Q2.5 | length 546
  Top w6: IC6.5@1911.85,1324.57 1915.85,1328.3 1939.85,1352.3 1939.85,1358.3 2065.85,1484.3 2173.85,1484.3 ; Q2.5@2171.85,1329.53 2173.85,1334.3 2173.85,1484.3 ; Q2.4@2171.85,1543.07 2173.85,1538.3 2173.85,1484.3
N$15: IC5.5 Q1.4 Q1.5 | length 1113.7
  Top w6: Q1.4@596.85,1339.53 601.85,1334.3 625.85,1334.3 691.85,1268.3 793.85,1268.3 823.85,1298.3 823.85,1370.3 817.85,1376.3 787.85,1376.3 775.85,1364.3 775.85,1298.3 769.85,1292.3 733.85,1292.3 727.85,1298.3 727.85,1418.3 853.85,1544.3 IC5.5@851.85,1548.03 847.85,1550.3 847.85,1562.3 817.85,1592.3 685.85,1592.3 649.85,1556.3 601.85,1556.3 Q1.5@596.85,1553.07
N$16: J3.2 Q2.2 | length 1305.4
  Top w6: v1(1759.85,2174.3) 2269.85,1664.3 2269.85,1544.3 Q2.2@2271.85,1543.07
  Bottom w6: v1(1759.85,2174.3) 2083.85,2498.3 J3.2@2081.85,2501.3
N$17: J2.2 Q1.2 | length 1219
  Top w6: v1(493.85,1424.3) 493.85,1340.3 Q1.2@496.85,1339.53
  Bottom w6: v1(493.85,1424.3) 453.85,1464.3 453.85,2428.3 529.85,2504.3 J2.2@530.71,2508.03
N$18: J2.1 Q1.6 | length 1190.7
  Top w6: v1(499.85,1460.3) 511.85,1448.3 v1(565,1426.55) ; Q1.6@546.85,1553.07 547.85,1550.3 v1(557,1496.55)
  Bottom w6: v1(499.85,1460.3) 499.85,1507.3 465.85,1541.3 465.85,2338.3 529.85,2402.3 J2.1@530.71,2408.03 ; v1(557,1496.55) v1(565,1426.55)
N$19: J3.1 Q2.6 | length 1444.3
  Top w6: v1(1759.85,2126.3) 2245.85,1640.3 2245.85,1508.3 2221.85,1484.3 Q2.6@2221.85,1329.53
  Bottom w6: v1(1759.85,2126.3) 1807.85,2126.3 2077.85,2396.3 J3.1@2081.85,2401.3
N$20: IC7.18 IC7.20 IC7.25 | length 171.8
  Top w6: IC7.25@1376.85,2496.3 1381.85,2498.3 1399.85,2516.3 1399.85,2552.3 IC7.20@1400.47,2555.36 1399.85,2558.3 1399.85,2576.3 1405.85,2582.3 1423.85,2582.3 1435.85,2570.3 1435.85,2534.3 IC7.18@1435.91,2535.67
N$21: C_G3.2 C_G4.2 | length 115.1
  Top w6: C_G3.2@1616.31,2446.3 1615.85,2450.3 1615.85,2558.3 C_G4.2@1616.31,2561.3
N$22: C_G2.1 IC7.10 | length 342.8
  Top w6: C_G2.1@1206.31,2551.3 1206.31,2506.83 1221.47,2506.83 1264.8,2463.5 v1(1264.8,2438.5) ; IC7.10@1384.72,2437.24 1384.72,2398.42 1386.85,2396.3 1386.85,2386.33 v1(1385.09,2384.57)
  Bottom w6: v1(1264.8,2438.5) 1318.73,2384.57 v1(1385.09,2384.57)
N$24: C_G1.1 C_G2.2 | length 111.2
  Top w6: C_G2.2@1137.39,2551.3 1137.38,2441.75 C_G1.1@1139.05,2441.65
N$25: C_B3.2 IC8.10 | length 99.8
  Top w6: v1(625.85,296.3) 661.85,296.3 IC8.10@667.2,298.94
  Bottom w6: C_B3.2@573.54,284.3 577.85,290.3 583.85,296.3 v1(625.85,296.3)
N$26: C_B4.2 IC8.8 | length 120.5
  Top w6: v1(667.85,368.3) 679.85,368.3 703.85,344.3 703.85,338.3 IC8.8@702.64,334.37
  Bottom w6: v1(667.85,368.3) 667.85,380.3 703.85,416.3 C_B4.2@703.88,417.83
N$27: D1.C R_R8.2 | length 238.6
  Top w6: R_R8.2@1985.9,3202.99 1987.85,3206.3 2089.85,3206.3 2179.85,3296.3 D1.C@2185.35,3296.45
N$28: C_B4.1 IC8.4 IC8.5 IC8.6 IC8.7 L6.2 R_B2.1 | length 602.7
  Top w6: L6.2@627.2,523.85 679.85,484.08 679.85,428.3 v1(739.85,368.3) 739.85,338.3 IC8.6@742.01,334.37 ; IC8.7@722.32,334.37 721.85,332.3 739.85,332.3 IC8.6@742.01,334.37 ; R_B2.1@952.04,278.21 949.85,278.3 925.85,278.3 835.85,368.3 799.85,368.3 781.85,350.3 781.85,338.3 IC8.4@781.38,334.37 781.85,332.3 763.85,332.3 IC8.5@761.69,334.37 757.85,332.3 745.85,332.3 IC8.6@742.01,334.37
  Bottom w6: v1(739.85,368.3) 769.85,398.3 769.85,416.3 C_B4.1@772.8,417.83
N$29: IC8.19 R_B1.2 | length 385.3
  Top w6: R_B1.2@544.05,70.74 565.05,86.3 v1(589.85,86.3) ; IC8.19@820.74,204.44 823.85,200.3 v1(847.85,200.3)
  Bottom w6: v1(589.85,86.3) 619.85,116.3 745.85,116.3 829.85,200.3 v1(847.85,200.3)
N$30: C_B10.2 IC8.18 R_B3.2 | length 701.6
  Top w6: C_B10.2@777.39,421.3 781.85,422.3 823.85,464.3 949.85,464.3 997.85,416.3 997.85,212.3 955.85,170.3 R_B3.2@952.2,166.3 949.85,170.3 823.85,170.3 799.85,194.3 799.85,200.3 IC8.18@801.06,204.45
N$31: IC8.3 R_B2.2 | length 222.5
  Top w6: IC8.3@801.06,334.37 799.85,338.3 799.85,344.3 811.85,356.3 829.85,356.3 871.85,314.3 v1(871.85,296.3) ; v1(907.85,332.3) 943.85,332.3 949.85,338.3 R_B2.2@952.04,342.39
  Bottom w6: v1(871.85,296.3) v1(907.85,332.3)
N$32: C_B5.2 IC8.1 IC8.2 | length 222.8
  Top w6: IC8.2@820.74,334.37 823.85,332.3 835.85,320.3 835.85,302.3 IC8.1@836.5,298.94 841.85,296.3 v1(841.85,272.3)
  Bottom w6: C_B5.2@837.39,421.3 841.85,416.3 v1(841.85,272.3)
N$33: Q10.3 R_R8.1 | length 997
  Top w6: Q10.3@1780.16,3201.3 1777.85,3200.3 1585.85,3200.3 1567.85,3182.3 1567.85,3164.3 1483.85,3080.3 1483.85,2990.3 1513.85,2960.3 1639.85,2960.3 1879.85,3200.3 1915.85,3200.3 R_R8.1@1921.72,3202.99
N$34: C_B6.2 R_B3.1 | length 419
  Top w6: v1(889.85,368.3) 973.85,368.3 985.85,356.3 985.85,260.3 973.85,248.3 967.85,248.3 955.85,236.3 R_B3.1@952.2,230.48
  Bottom w6: C_B6.2@837.39,521.3 841.85,518.3 871.85,488.3 871.85,386.3 v1(889.85,368.3)
N$35: IC8.17 R_B4.1 R_B5.2 | length 405.2
  Top w6: R_B4.1@476.03,91.3 481.85,119.96 481.85,166.3 R_B5.2@478.69,166.81 483.07,164.3 v1(589.85,164.3) ; v1(751.85,164.3) 781.85,194.3 781.85,200.3 IC8.17@781.38,204.45
  Bottom w6: v1(589.85,164.3) v1(751.85,164.3)
N$37: Q14.3 R_R17.1 | length 201
  Top w6: R_R17.1@1387.44,3328.74 1387.85,3326.3 1471.85,3326.3 1549.85,3248.3 Q14.3@1551.85,3244.61
N$38: C_B7.2 C_B8.2 C_B9.2 IC8.12 IC8.13 | length 444.2
  Top w6: v1(655.85,212.3) 661.85,206.3 679.85,206.3 IC8.12@682.95,204.45 685.85,206.3 703.85,206.3 IC8.13@702.64,204.45
  Bottom w6: C_B9.2@606.31,546.3 601.85,542.3 601.85,482.3 577.85,458.3 C_B8.2@576.31,456.3 577.85,452.3 577.85,368.3 C_B7.2@576.31,366.3 577.85,362.3 595.85,362.3 655.85,302.3 v1(655.85,212.3)
N$39: D5.C R_R17.2 | length 201
  Top w6: D5.C@1331.85,3571.3 1333.85,3566.3 1381.85,3518.3 1381.85,3398.3 R_R17.2@1387.44,3392.92
N$40: D2.C R_R10.2 | length 173.4
  Top w6: D2.C@1869.18,3669.15 1873.85,3674.3 1975.85,3776.3 1993.85,3776.3 R_R10.2@1996.41,3779.67
N$41: Q11.3 R_R10.1 | length 373.3
  Top w6: Q11.3@1631.85,3859.61 1633.85,3854.3 1639.85,3848.3 1993.85,3848.3 R_R10.1@1996.41,3843.85
N$42: C2V_2.2 PS1.8 R_2V1.1 R_2V2.1 | length 729.6
  Top w6: PS1.8@1782,487.76 1782,614.4 1788.92,621.31 1878.11,621.31 C2V_2.2@1914.41,657.61 1914.41,653.18 1952.25,615.33 1952.25,562.03 1914.41,524.18 1914.41,467.56 1797.79,350.95 R_2V1.1@1864.09,350.95
N$43: D7.2 LS1.1 Q15.3 | length 767.3
  Top w6: LS1.1@669.84,2887.72 673.85,2882.3 673.85,2684.3 721.85,2636.3 817.85,2636.3 841.85,2660.3 841.85,2768.3 883.85,2810.3 Q15.3@886.85,2812.99 889.85,2816.3 889.85,2918.3 949.85,2978.3 D7.2@951.85,2978.69
N$44: C_EM11.1 C_EM12.2 D7.1 L7.1 LS1.2 | length 999.6
  Top w6: LS1.2@673.85,3068.3 LS1.2@669.84,3064.88 758.73,3064.88 799.85,3023.76 ; L7.1@768.86,2676.3 769.85,2678.3 769.85,2744.3 859.85,2834.3 ; C_EM12.2@841.85,3065.76 799.85,3023.76 ; v1(961.85,3116.3) 961.85,3080.3 955.85,3074.3 D7.1@951.85,3070.19 949.85,3068.3 949.85,3026.3 871.85,2948.3 871.85,2846.3 859.85,2834.3 ; 799.85,3023.76 799.85,2894.3 859.85,2834.3
  Bottom w6: C_EM11.1@916.31,3136.3 918.31,3134.3 943.85,3134.3 v1(961.85,3116.3)
N$45: D3.C R_R12.2 | length 513.2
  Top w6: D3.C@594.45,3296.14 595.85,3296.3 619.85,3296.3 697.85,3374.3 883.85,3374.3 889.85,3368.3 889.85,3320.3 883.85,3314.3 877.85,3314.3 793.85,3230.3 R_R12.2@792.82,3228.93
N$46: Q12.3 R_R12.1 | length 1351.7
  Top w6: R_R12.1@857,3228.93 859.85,3230.3 859.85,3272.3 1063.85,3476.3 1063.85,3788.3 1075.85,3800.3 1177.85,3800.3 1201.85,3776.3 1201.85,3620.3 1189.85,3608.3 1189.85,3230.3 Q12.3@1191.85,3229.61
N$47: PS1.4 R_2V3.2 | length 118.3
  Top w6: R_2V3.2@1724.21,355.24 1785.71,416.74 1790.65,416.74 1801.69,427.78 PS1.4@1801.69,438.54
N$48: C_VCAP2.1 IC9.47 | length 417.8
  Top w6: v1(985.85,1136.3) 985.85,1118.3 1015.85,1088.3 C_VCAP2.1@1021.31,1086.3 ; v1(1093.85,890.3) 1111.85,872.3 1141.85,872.3 IC9.47@1145.47,868.34
  Bottom w6: v1(985.85,1136.3) 1093.85,1028.3 v1(1093.85,890.3)
N$51: D4.C R_R14.2 | length 288.2
  Top w6: R_R14.2@800.59,3846.81 805.85,3842.3 805.85,3626.3 847.85,3584.3 D4.C@851.49,3579.64
N$52: Q13.3 R_R14.1 | length 265.3
  Top w6: R_R14.1@864.77,3846.81 865.85,3848.3 1117.85,3848.3 1123.85,3854.3 Q13.3@1126.85,3854.61
N$53: C_VCAP1.2 IC9.31 | length 116.8
  Top w6: C_VCAP1.2@1169.64,1286.84 1171.85,1286.3 1207.85,1286.3 1243.85,1250.3 1243.85,1226.3 IC9.31@1243.9,1222.68
N$63: Q18.3 R_LED1.1 | length 125.1
  Top w6: R_LED1.1@1080.04,1610.35 1081.85,1616.3 1111.85,1646.3 v1(1111.85,1688.3)
  Bottom w6: v1(1111.85,1688.3) 1111.85,1718.3 Q18.3@1115.16,1721.3
N$64: D11.C R_LED1.2 | length 101.2
  Top w6: R_LED1.2@1080.04,1546.17 1081.85,1550.3 1171.85,1550.3 D11.C@1176.85,1545.83
N$66: Q19.3 R_LED2.1 | length 130.9
  Top w6: R_LED2.1@1259.68,1609.79 1261.85,1610.3 v1(1261.85,1676.3)
  Bottom w6: v1(1261.85,1676.3) 1303.85,1718.3 Q19.3@1305.16,1721.3
N$67: D14.C R_LED2.2 | length 77.2
  Top w6: R_LED2.2@1259.68,1545.61 1261.85,1550.3 1327.85,1550.3 D14.C@1331.85,1545.83
N$69: D22.A R_LED9.1 | length 151.7
  Top w6: D22.A@353.15,428.42 349.85,434.3 319.85,464.3 319.85,506.3 349.85,536.3 349.85,548.3 R_LED9.1@353.62,553.15
N$70: Q20.3 R_LED3.1 | length 144.6
  Top w6: R_LED3.1@1515.39,1610.35 1519.85,1616.3 1537.85,1616.3 v1(1555.85,1634.3)
  Bottom w6: Q20.3@1540.16,1721.3 1543.85,1718.3 1555.85,1706.3 v1(1555.85,1634.3)
N$71: D17.C R_LED3.2 | length 83.1
  Top w6: D17.C@1436.85,1545.83 1441.85,1550.3 1513.85,1550.3 R_LED3.2@1515.39,1546.17
N$72: D23.A R_LED8.2 | length 61.4
  Top w6: D23.A@265,433.42 265.85,434.3 265.85,494.3 R_LED8.2@265.82,494.51
N$74: Q21.3 R_LED4.1 | length 146.4
  Top w6: R_LED4.1@1668.58,1605.35 1669.85,1610.3 v1(1669.85,1646.3)
  Bottom w6: v1(1669.85,1646.3) 1741.85,1718.3 Q21.3@1740.16,1721.3
N$75: D20.C R_LED4.2 | length 68.2
  Top w6: D20.C@1601.85,1545.83 1603.85,1544.3 1663.85,1544.3 R_LED4.2@1668.58,1541.17
NCS: IC7.22 IC9.17 | length 1620.5
  Top w6: IC7.22@1368.98,2555.36 1369.85,2558.3 1369.85,2576.3 1387.85,2594.3 1429.85,2594.3 1459.85,2564.3 1459.85,2408.3 1485.85,2382.3 1485.85,1912.3 1375.85,1802.3 1375.85,1730.3 v1(1471.85,1634.3) ; IC9.17@1519.49,1222.68 1519.85,1226.3 1537.85,1244.3 v1(1549.85,1244.3)
  Bottom w6: v1(1471.85,1634.3) 1471.85,1322.3 v1(1549.85,1244.3)
R_EMITTER: IC9.39 Q11.1 R_R11.2 | length 4743.4
  Top w6: v1(679.85,1244.3) 787.85,1136.3 v1(925.85,1136.3) ; v1(703.85,1616.3) 691.85,1616.3 679.85,1604.3 625.85,1604.3 295.85,1934.3 295.85,3314.3 343.85,3362.3 361.85,3362.3 763.85,3764.3 v1(763.85,3854.3) ; v1(1069.85,1016.3) 1075.85,1022.3 1141.85,1022.3 IC9.39@1145.47,1025.83 ; Q11.1@1594.45,3772.99 1597.85,3776.3 1645.85,3824.3 v1(1663.85,3824.3)
  Bottom w6: v1(679.85,1244.3) 679.85,1592.3 v1(703.85,1616.3) ; v1(763.85,3854.3) 1633.85,3854.3 v1(1663.85,3824.3) 1693.85,3854.3 1765.85,3854.3 R_R11.2@1768.97,3859.38 ; v1(925.85,1136.3) 1045.85,1016.3 v1(1069.85,1016.3)
R_RECEIVER_1: IC9.24 Q6.1 R_R4.2 | length 3130.7
  Top w6: IC9.24@1381.69,1222.68 1381.85,1226.3 1381.85,1256.3 1399.85,1274.3 1423.85,1274.3 1447.85,1298.3 1447.85,1304.3 1567.85,1424.3 1759.85,1424.3 1801.85,1466.3 1801.85,1580.3 1699.85,1682.3 v1(1699.85,1934.3) ; v1(2125.85,2462.3) 2125.85,2595.3 2211.85,2681.3 2211.85,2934.3 v1(2191.85,2954.3) ; R_R4.2@2295.08,3004.45 2299.85,3008.3 2299.85,3020.3 2329.85,3050.3 v1(2329.85,3278.3)
  Bottom w6: v1(1699.85,1934.3) 1699.85,1958.3 2125.85,2384.3 v1(2125.85,2462.3) ; v1(2191.85,2954.3) 2191.85,3140.3 v1(2329.85,3278.3) 2443.85,3392.3 Q6.1@2446.85,3396.3
RENCHA: IC9.50 J3.6 | length 3054.4
  Top w6: IC9.50@1243.9,769.92 1243.85,770.3 1243.85,818.3 v1(1297.85,872.3) ; v1(1789.85,998.3) 2059.85,998.3 2101.85,956.3 2281.85,956.3 2365.85,1040.3 2365.85,1358.3 2437.85,1430.3 2443.85,1430.3 2473.85,1460.3 2473.85,1940.3 2137.85,2276.3 2137.85,2414.3 2185.85,2462.3 2245.85,2462.3 2281.85,2498.3 J3.6@2281.85,2501.3
  Bottom w6: v1(1297.85,872.3) 1687.85,872.3 1741.85,926.3 1741.85,950.3 v1(1789.85,998.3)
RENCHB: IC9.55 J3.5 | length 2466.6
  Top w6: IC9.55@1342.32,769.92 1345.85,770.3 1345.85,848.3 1465.85,968.3 v1(1465.85,1052.3)
  Bottom w6: v1(1465.85,1052.3) 1735.85,1322.3 1735.85,1508.3 1753.85,1526.3 2041.85,1526.3 2131.85,1436.3 2167.85,1436.3 2371.85,1640.3 2371.85,2306.3 2281.85,2396.3 J3.5@2281.85,2401.3
RESET: C_RST.1 DS1.12 IC9.7 R_LED7.2 S3.1 | length 3910.4
  Top w6: DS1.12@1126.85,3006.3 1129.85,3002.3 1129.85,2864.3 1279.85,2714.3 1279.85,2690.3 1309.85,2660.3 1339.85,2660.3 1381.85,2702.3 1381.85,2720.3 1411.85,2750.3 1441.85,2750.3 1483.85,2708.3 1483.85,2420.3 1513.85,2390.3 1513.85,2156.3 1873.85,1796.3 v1(1873.85,1478.3) ; IC9.7@1598.23,966.77 1603.85,968.3 v1(1675.85,968.3) ; v1(1819.85,1094.3) v1(1885.85,1094.3) 2035.85,1094.3 v1(2149.85,980.3) ; v1(2107.85,776.3) 2101.85,770.3 2101.85,734.3 R_LED7.2@2101.65,730.67 2101.85,728.3 2101.85,674.3 2203.85,572.3 2203.85,380.3 2269.85,314.3 S3.1@2271.14,309.8
  Bottom w6: v1(1675.85,968.3) 1693.85,968.3 v1(1819.85,1094.3) ; v1(1873.85,1478.3) 1873.85,1106.3 v1(1885.85,1094.3) ; C_RST.1@2066.85,735.76 2071.85,740.3 v1(2107.85,776.3) 2149.85,818.3 v1(2149.85,980.3)
RF_EMITTER: IC9.41 Q13.1 R_R15.2 | length 4341.9
  Top w6: v1(487.85,698.3) 511.85,722.3 511.85,734.3 769.85,992.3 1045.85,992.3 1051.85,986.3 1141.85,986.3 IC9.41@1145.47,986.45 ; v1(643.85,3140.3) 817.85,3140.3 1105.85,3428.3 1105.85,3644.3 R_R15.2@1108.37,3649.48 1105.85,3650.3 1105.85,3752.3 1093.85,3764.3 Q13.1@1089.45,3767.99
  Bottom w6: v1(487.85,698.3) 421.85,764.3 421.85,944.3 347.85,1018.3 347.85,1386.3 424.85,1463.3 424.85,2921.3 v1(643.85,3140.3)
RF_RECEIVER: IC9.26 Q4.1 R_R2.2 | length 3637.6
  Top w6: v1(1135.85,3074.3) 1081.85,3020.3 1081.85,2396.3 1156.85,2321.3 1156.85,1733.3 v1(1171.85,1718.3) ; IC9.26@1342.32,1222.68 1345.85,1220.3 v1(1345.85,1172.3) ; v1(1717.85,3074.3) 1735.85,3074.3 v1@2035.85,3374.3 ; v1(2035.85,3362.3) v1@2035.85,3374.3 ; Q4.1@2154.64,3729.55 2149.85,3728.3 2149.85,3626.3 2035.85,3512.3 v1@2035.85,3374.3
  Bottom w6: v1(1135.85,3074.3) 1145.85,3084.3 1707.85,3084.3 v1(1717.85,3074.3) ; v1(1171.85,1718.3) 1171.85,1652.3 1201.85,1622.3 1201.85,1544.3 1369.85,1376.3 1369.85,1262.3 1345.85,1238.3 v1(1345.85,1172.3) ; R_R2.2@1968.62,3324.45 2003.7,3330.15 v1(2035.85,3362.3)
RPWMA: IC6.2 IC9.59 R_PWMUP3.1 | length 1352.1
  Top w6: R_PWMUP3.1@1343.62,633.15 1345.85,638.3 1345.85,662.3 1411.85,728.3 ; IC9.59@1421.06,769.92 1417.85,764.3 1417.85,734.3 1411.85,728.3 ; v1(1423.85,716.3) 1411.85,728.3 ; v1(1597.85,716.3) v1(1675.85,794.3) ; v1(1957.85,1412.3) 2011.85,1466.3 IC6.2@2011.85,1538.03
  Bottom w6: v1(1423.85,716.3) v1(1597.85,716.3) ; v1(1675.85,794.3) 1957.85,1076.3 v1(1957.85,1412.3)
RPWMB: IC6.4 IC9.58 R_PWMUP4.1 | length 1397.7
  Top w6: R_PWMUP4.1@1253.62,630.55 1255.85,632.3 1291.85,632.3 1399.85,740.3 1399.85,764.3 IC9.58@1401.38,769.92 1405.85,770.3 v1(1405.85,824.3) ; v1(1909.85,1484.3) 1909.85,1532.3 IC6.4@1911.85,1538.03
  Bottom w6: v1(1405.85,824.3) 1687.85,824.3 1945.85,1082.3 1945.85,1136.3 1909.85,1172.3 v1(1909.85,1484.3)
RS: DS1.5 IC9.38 | length 2629.6
  Top w6: v1(697.85,1004.3) 1021.85,1004.3 1063.85,1046.3 1141.85,1046.3 IC9.38@1145.47,1045.51 ; v1(1231.85,1910.3) 1231.85,2366.3 v1(1249.85,2384.3)
  Bottom w6: v1(697.85,1004.3) 697.85,1226.3 973.85,1502.3 973.85,1790.3 1093.85,1910.3 v1(1231.85,1910.3) ; v1(1249.85,2384.3) 1229.8,2404.34 1229.8,2446.25 1489.85,2706.3 DS1.5@1526.85,2706.3
RX: IC9.43 J4.5 | length 986.3
  Top w6: IC9.43@1145.47,947.09 1141.85,944.3 1111.85,944.3 1069.85,902.3 1069.85,542.3 1237.85,374.3 1273.85,374.3 1303.85,344.3 1303.85,308.3 1333.85,278.3 1399.85,278.3 1447.85,326.3 J4.5@1451.85,326.3
SCLK: IC7.23 IC9.21 | length 2280.2
  Top w6: IC7.23@1353.23,2555.36 1351.85,2558.3 1351.85,2576.3 1381.85,2606.3 1435.85,2606.3 1471.85,2570.3 1471.85,2414.3 1497.85,2388.3 1497.85,1906.3 1387.85,1796.3 1387.85,1772.3 1501.85,1658.3 1567.85,1658.3 1657.85,1568.3 1699.85,1568.3 v1(1765.85,1502.3) ; IC9.21@1440.74,1222.67 1441.85,1220.3 1441.85,1190.3 1531.85,1100.3 v1(1531.85,1082.3) ; v1(1651.85,1112.3) v1(1789.85,1250.3)
  Bottom w6: v1(1531.85,1082.3) 1561.85,1112.3 v1(1651.85,1112.3) ; v1(1765.85,1502.3) 1789.85,1478.3 v1(1789.85,1250.3)
SDI: IC7.24 IC9.23 | length 2325.1
  Top w6: v1(847.85,1412.3) v1(943.85,1316.3) ; v1(997.85,2396.3) 997.85,1916.3 v1(1003.85,1910.3) ; v1(1255.85,1046.3) 1399.85,1190.3 1399.85,1220.3 IC9.23@1401.38,1222.68 ; v1(1255.85,2552.3) 1333.85,2552.3 IC7.24@1337.48,2555.36
  Bottom w6: v1(847.85,1412.3) 847.85,1682.3 1027.85,1862.3 1027.85,1886.3 v1(1003.85,1910.3) ; v1(943.85,1316.3) 967.85,1316.3 991.85,1292.3 991.85,1202.3 1147.85,1046.3 v1(1255.85,1046.3) ; v1(997.85,2396.3) 1153.85,2552.3 v1(1255.85,2552.3)
SDO: IC7.9 IC9.22 | length 1460.7
  Top w6: v1(1219.85,1640.3) 1219.85,1670.3 1255.85,1706.3 1255.85,2108.3 1329.85,2182.3 1329.85,2363.11 1368.97,2402.24 IC7.9@1368.98,2437.24 ; v1(1417.85,1172.3) 1417.85,1220.3 IC9.22@1421.06,1222.68
  Bottom w6: v1(1219.85,1640.3) 1219.85,1544.3 1417.85,1346.3 v1(1417.85,1172.3)
TX: IC9.42 J4.7 | length 1091.1
  Top w6: v1(1033.85,692.3) 979.85,746.3 979.85,770.3 991.85,782.3 1021.85,782.3 1057.85,818.3 1057.85,908.3 1111.85,962.3 1141.85,962.3 IC9.42@1145.47,966.77
  Bottom w6: v1(1033.85,692.3) 1111.85,692.3 1189.85,614.3 1231.85,614.3 1405.85,440.3 1405.85,404.3 1435.85,374.3 1501.85,374.3 1549.85,326.3 J4.7@1551.85,326.3
V_BAT: C_B1.1 C_B2.1 C_VBAT2.1 IC8.9 L6.1 S2.3 XFL4020.2 | length 2839.7
  Top w6: v1(523.85,248.3) 613.85,338.3 ; v1(679.85,632.3) v1@667.85,632.3 ; IC8.9@682.95,334.37 679.85,338.3 613.85,338.3 ; L6.1@711.24,523.85 667.85,567.25 v1@667.85,632.3 ; v1(1513.85,158.3) 1831.85,158.3 1879.85,110.3 1909.85,110.3 S2.3@1912.48,109.44 1915.85,110.3 2059.85,254.3 2059.85,338.3 XFL4020.2@2061.93,338.94 ; 613.85,338.3 607.85,338.3 541.85,404.3 C_VBAT2.1@536.31,406.3 541.85,410.3 553.85,422.3 553.85,518.3 v1@667.85,632.3
  Bottom w6: C_B1.1@358.93,283.27 474.64,283.28 C_B2.1@475.39,284.02 ; C_B2.1@469.85,284.3 C_B2.1@475.39,284.02 ; v1(523.85,248.3) 493.85,278.3 475.85,278.3 C_B2.1@475.39,284.02 ; v1(679.85,632.3) 911.85,632.3 941.85,602.3 1207.85,602.3 1297.85,512.3 1297.85,314.3 1399.85,212.3 1399.85,152.3 1435.85,116.3 1471.85,116.3 v1(1513.85,158.3)
V_BAT_FILTER: C_VBAT1.1 C_VBAT3.2 C_VBAT4.2 IC1.7 IC1.8 R_VM1.2 XFL4020.1 | length 2825.7
  Top w6: v1(698,792.55) 727.85,800.3 IC1.7@733.78,800.55 733.85,800.3 733.85,770.3 733.78,769.05 733.85,764.3 733.85,716.3 769.85,680.3 769.85,644.3 C_VBAT1.1@772.39,641.3 775.85,638.3 775.85,524.3 C_VBAT3.2@772.39,521.3 775.85,518.3 811.85,482.3 v1(967.85,482.3) ; C_VBAT4.2@912.39,636.3 913.85,638.3 913.85,680.3 v1(931.85,698.3) ; v1(1207.85,242.3) 1520.85,242.3 1519.85,241.3 1579.85,181.3 1878.85,181.3 2023.85,326.3 2023.85,386.3 2059.85,422.3 2059.85,464.3 XFL4020.1@2061.93,464.92
  Bottom w6: v1(698,792.55) 757.85,854.3 ; v1(931.85,698.3) 913.85,698.3 757.85,854.3 ; R_VM1.2@954.65,1258.46 949.85,1256.3 949.85,1196.3 781.85,1028.3 781.85,878.3 757.85,854.3 ; v1(967.85,482.3) v1(1207.85,242.3)
V_BOOST: C_B7.1 C_B8.1 C_B9.1 C_M1.1 C_M2.2 C_M4.2 C_M5.1 C_MB_L.2 C_MB_R.2 IC5.6 IC6.6 IC8.14 IC8.15 IC8.16 Q1.7 Q2.7 R_B4.2 | length 8236.3
  Top w6: 474.85,1010.3 479.8,1015.25 479.8,1068.5 469.96,1078.34 469.96,1466.41 474.85,1471.3 ; 499.85,368.3 499.85,440.3
  Top w8: 423.85,516.3 499.85,440.3
  Top w12: 423.85,516.3 423.85,963.89 452.43,992.47 457.02,992.47 474.85,1010.3 ; v1(457.85,332.3) v1@457.85,326.3 ; 474.85,1471.3 474.85,1491.3 495.85,1512.3 499.85,1508.3 ; 479.85,54.3 479.8,54.3 ; 499.85,368.3 v1@457.85,326.3 ; v1(511.85,1604.3) 511.85,1568.3 499.85,1556.3 Q1.7@496.85,1553.07 499.85,1550.3 499.85,1508.3 ; IC8.14@722.32,204.45 IC8.14@721.85,206.3 ; IC8.16@761.69,204.45 757.85,206.3 745.85,206.3 IC8.15@742.01,204.45 739.85,206.3 IC8.14@721.85,206.3 ; IC5.6@801.85,1548.03 801.85,1520.35 801.02,1519.47 748.85,1467.3 540.85,1467.3 499.85,1508.3 ; IC6.6@1961.85,1324.57 1961.85,1298.33 1961.89,1298.25 1985.85,1274.3 v1(2035.85,1274.3) ; v1(2161.85,2288.3) v1(2209.85,2288.3) 2495.85,2002.3 2495.85,1444.3 2397.85,1346.3 v1(2389.85,1346.3) ; v1(2227.85,1274.3) 2269.85,1316.3 2269.85,1328.3 Q2.7@2271.85,1329.53 ; v1@457.85,326.3 457.85,317.3 340.85,200.3 340.85,155.3 402.51,93.63 R_B4.2@411.85,91.3 416.51,79.63 441.85,54.3 479.8,54.3 ; 479.8,54.3 485.63,60.12 496.73,60.12 505.11,68.5 509.8,68.5 512.88,71.58 512.88,91.44 524.74,103.3 565.85,103.3 583.85,121.3 652.99,121.3 719.8,188.1 719.8,204.25 IC8.14@721.85,206.3
  Bottom w12: v1(457.85,332.3) 487.85,362.3 505.85,362.3 C_B7.1@507.39,366.3 511.85,368.3 511.85,452.3 C_B8.1@507.39,456.3 511.85,458.3 535.85,482.3 535.85,542.3 C_B9.1@537.39,546.3 ; v1(511.85,1604.3) 506.85,1609.3 506.85,1721.3 527.85,1742.3 559.85,1742.3 C_MB_L.2@565,1745.76 565.85,1748.3 673.85,1748.3 C_M2.2@675,1745.76 679.85,1748.3 781.85,1748.3 C_M1.1@785,1745.76 787.85,1748.3 787.85,2246.3 896.85,2355.3 1212.85,2355.3 1825.85,1742.3 1987.85,1742.3 C_M5.1@1991.85,1740.76 1993.85,1742.3 2137.85,1742.3 C_M4.2@2141.85,1740.76 2143.85,1742.3 2161.85,1760.3 v1(2161.85,2288.3) ; v1(2035.85,1274.3) v1(2227.85,1274.3) 2232.85,1279.3 2322.85,1279.3 v1(2389.85,1346.3) ; v1(2209.85,2288.3) 2311.85,2186.3 2311.85,1742.3 C_MB_R.2@2316.85,1740.76
VOL_METER: IC9.27 R_VM1.1 R_VM2.2 | length 490.9
  Top w6: IC9.27@1322.64,1222.68 1321.85,1226.3 v1(1321.85,1286.3) 1333.85,1298.3 1393.85,1298.3 R_VM2.2@1398.86,1300.74
  Bottom w6: R_VM1.1@1018.83,1258.46 1021.85,1262.3 1081.85,1322.3 1285.85,1322.3 v1(1321.85,1286.3)
VOL_METER_BOOST: IC9.11
pads on no net: DS1.1 DS1.2 IC5.1 IC5.8 IC6.1 IC6.8 IC7.1 IC7.2 IC7.3 IC7.4 IC7.5 IC7.6 IC7.7 IC7.14 IC7.15 IC7.16 IC7.17 IC7.19 IC7.21 IC9.8 IC9.25 IC9.35 LS1.3 PS1.2 PS1.6 PS1.7 PS1.9 S1.2 S1.3 S3.2 S3.3

## Polygon pours and split planes (outlines as drawn)
GND on Bottom "Polygon_1_Net_GND" (solid, remove dead copper, pour order 0): 300.61,3990 2412.14,3990 2857.6,3544.54 2857.6,245.61 2462.14,-149.85 447.46,-149.85 -144.85,442.46 -144.85,3544.54
GND on Top "Polygon_2_Net_GND" (solid, remove dead copper, pour order 1): -198,4136.85 2408.99,4136.85 2957.6,3588.24 2957.6,195.61 2512.14,-249.85 444.31,-249.85 -198,392.46

## Keep-outs
Top:
  region: 2407.83,614.92 2407.83,1638.54 2565.31,1638.54 2565.31,614.92
  region: 204.29,2283.46 204.29,3228.34 361.77,3228.34 361.77,2283.46
  region: 199.29,629.92 199.29,1653.54 356.77,1653.54 356.77,629.92
  region: 2405.98,2273.46 2405.98,3218.34 2563.46,3218.34 2563.46,2273.46
  region: 1777.91,1638.54 1777.91,2268.46 2565.31,2268.46 2565.31,1638.54
  region: 199.29,1653.54 199.29,2283.46 986.69,2283.46 986.69,1653.54
  lines w6: -195,1181.1 198.7,1181.1 ; -195,2755.9 198.7,2755.9 ; 1.85,1968.5 2757.75,1968.5 ; 1379.8,-196.85 1379.8,4133.85 ; 2560.9,1181.1 2954.6,1181.1 ; 2560.9,2755.9 2954.6,2755.9
Keep-Out Layer:
  the board outline again, w0

## Silkscreen, mask and mechanical layers (free items; w line width, h text height)
Bottom Overlay:
  text "Bubble 1.0" at 1576.65,1968.5 h56.1
  text "Designed by Thamara" at 1610.78,1934.9 h20.4
Dimension:
  the board outline again, w0

## Dimensions
1.85,1968.5 to 1.85,590.55 on tFinish
199.29,590.55 to 198.7,3346.45 on tFinish
396.65,3935.86 to 395.55,0 on tFinish
2757.75,3346.45 to 1.85,3346.45 on tFinish
199.17,3346.22 to 2560.9,3346.45 on tFinish
396.65,3935.86 to 2364.05,3937 on tFinish
396.65,3935.86 to 1.85,3543.3 on tFinish

## Text inside footprints (layer, text, board x,y; h text height)
J2: tPlace "6" at 790.71,2483.03 h42.5; tPlace "1" at 505.71,2293.03 h42.5
J3: tPlace "6" at 2341.85,2476.3 h42.5; tPlace "1" at 2056.85,2286.3 h42.5